# Altium PCB 20K Control Board V1.1.PcbDoc (part 3 of 24)
Units mm, origin at the board's own origin, x right, y up, seen from the top; angles counter-clockwise.
Board outline 132 x 260 mm, 4 copper layers (Top Layer, GND, VCC, Bottom Layer); 1384 components, 779 nets, 4515 pads, 1774 vias.
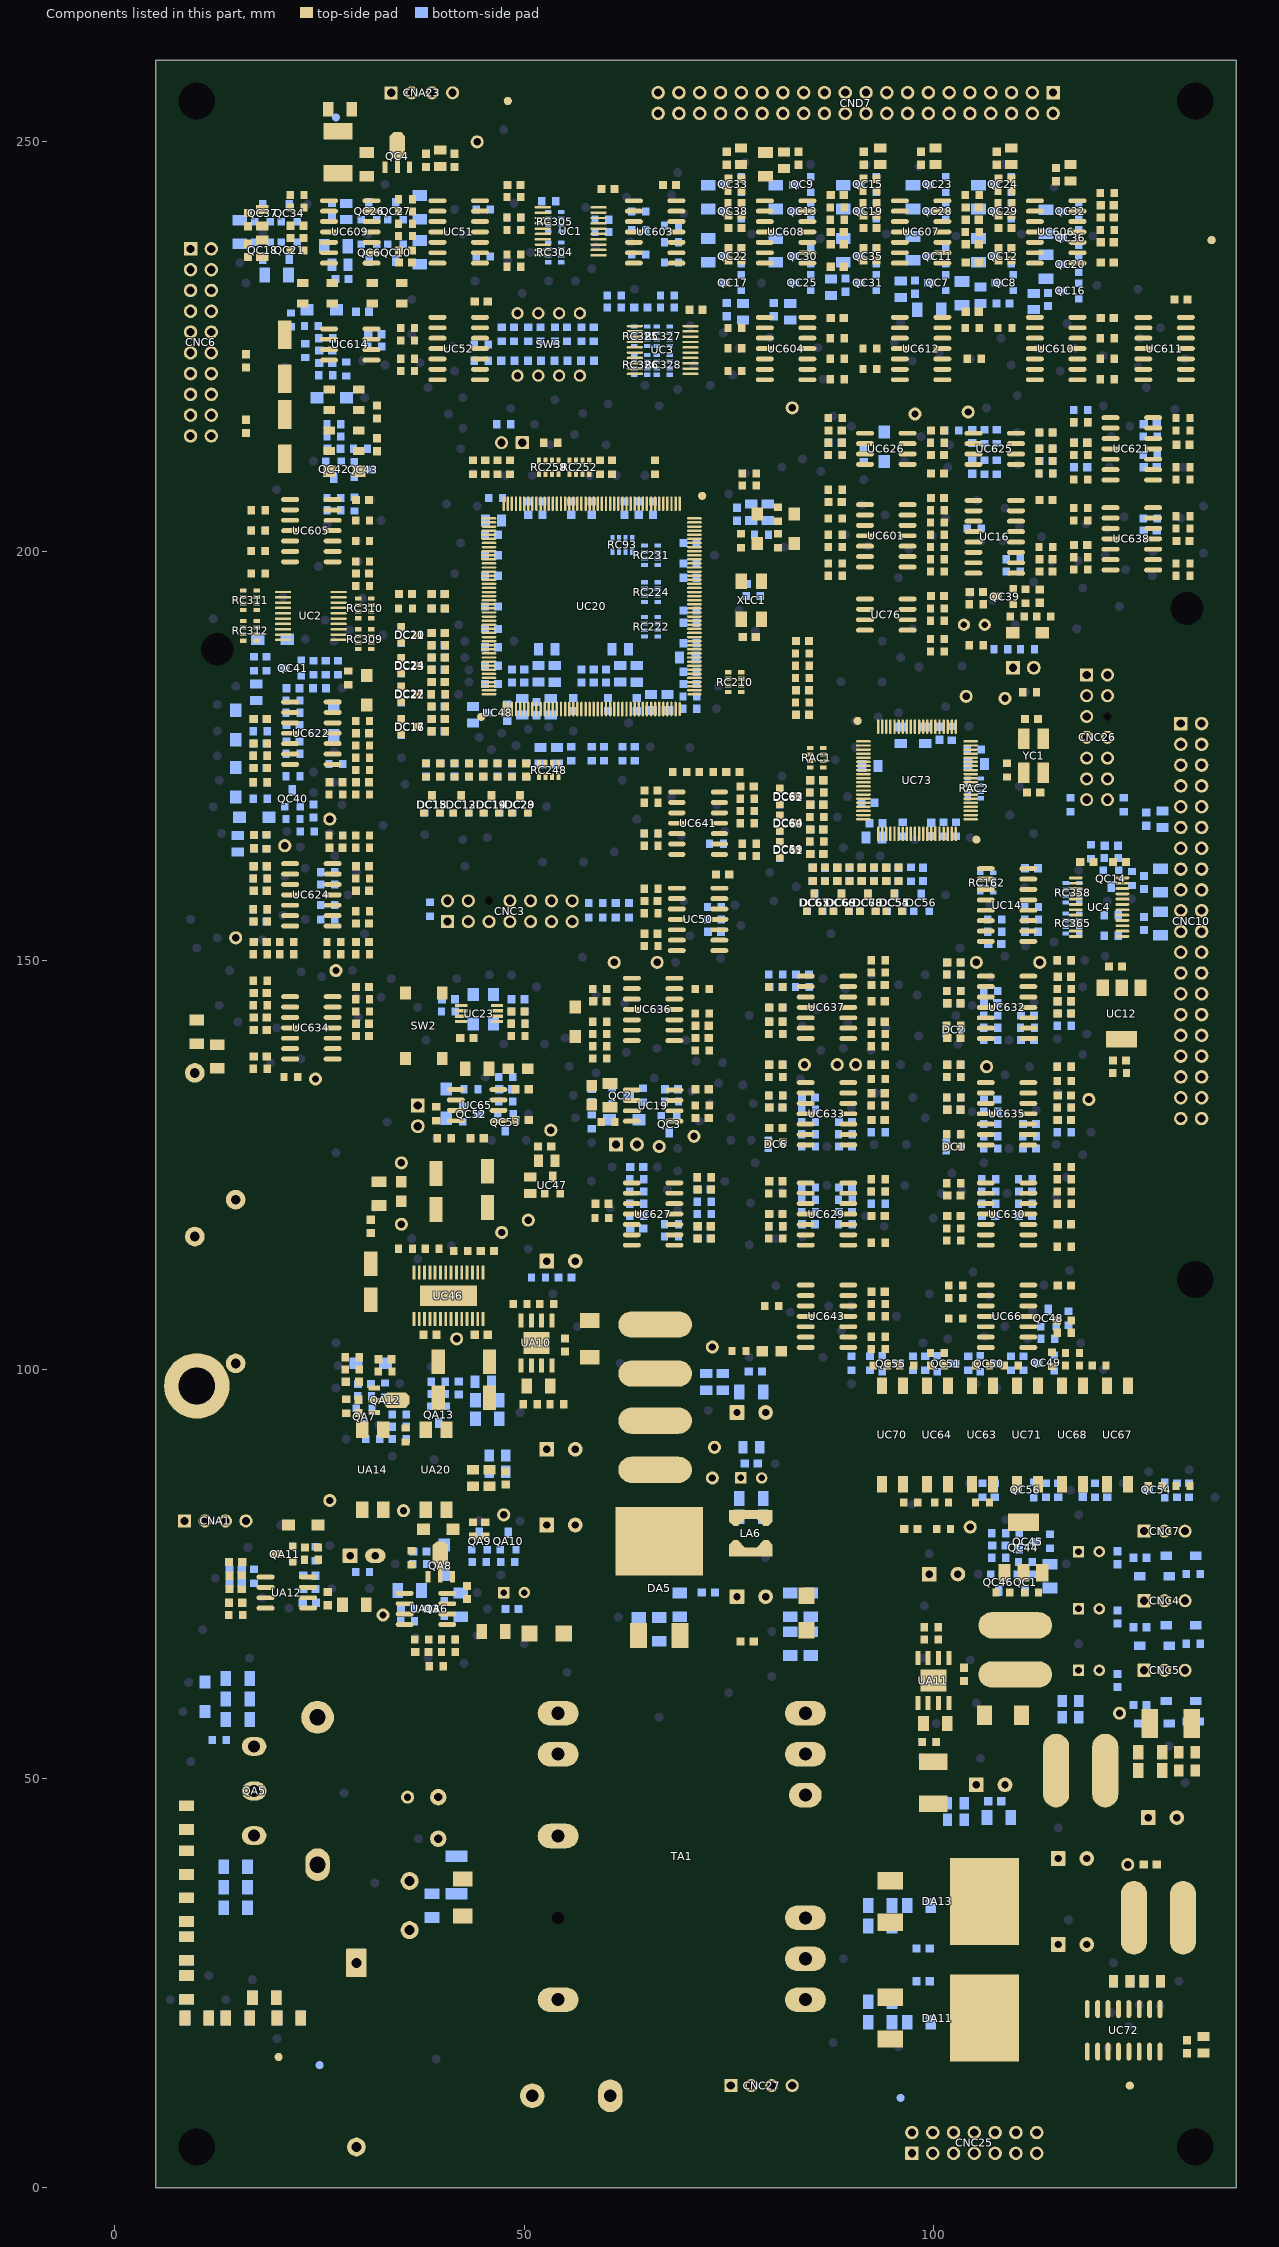
[diagram p5: the components of this part, seen from the top]

## Footprints (in the part's own frame and the unit in brackets; to place one, negate y for a bottom-side part, rotate by r counter-clockwise, add the part's x,y. Pads: shape width x height; smd on the part's side, far side on the other; paste and mask are expansions set on the pad) (continued)
CN2.54-2*20P#2 [mm] "牛角端子/Body size:8.5*70mm /Pitch:2.54mm/2*20P"
  rect 1.65x1.65 hole 1: 1(-24.13,-1.27)
  round 1.65 hole 1: 2(-24.13,1.27) 3(-21.59,-1.27) 4(-21.59,1.27) 5(-19.05,-1.27) 6(-19.05,1.27) 7(-16.51,-1.27) 8(-16.51,1.27) 9(-13.97,-1.27) 10(-13.97,1.27) 11(-11.43,-1.27) 12(-11.43,1.27) 13(-8.89,-1.27) 14(-8.89,1.27) 15(-6.35,-1.27) 16(-6.35,1.27) 17(-3.81,-1.27) 18(-3.81,1.27) 19(-1.27,-1.27) 20(-1.27,1.27) 21(1.27,-1.27) 22(1.27,1.27) 23(3.81,-1.27) 24(3.81,1.27) 25(6.35,-1.27) 26(6.35,1.27) 27(8.89,-1.27) 28(8.89,1.27) 29(11.43,-1.27) 30(11.43,1.27) 31(13.97,-1.27) 32(13.97,1.27) 33(16.51,-1.27) 34(16.51,1.27) 35(19.05,-1.27) 36(19.05,1.27) 37(21.59,-1.27) 38(21.59,1.27) 39(24.13,-1.27) 40(24.13,1.27)
  silkscreen extent -45.7,-5.02 35.2,4.25, body extent -35.3,-4.3 35.3,4.3, height 17
CN2P9.52 [mm] "CN2P9.52"
  round 3 hole 1.5: 1(-4.76,0)
  oval 3x4 hole 1.5: 2(4.76,0)
  silkscreen extent -9.52,-7.9 10.24,4.6
CN-SIP2.54-2P#1 [mm] "Pin header/Body Size:5.08*2.5mm/pitch:2.54mm/2pin S/T"
  rrect10% 1.7x1.7 hole 1: 1(-1.27,0)
  round 1.7 hole 1: 2(1.27,0)
  silkscreen extent -2.54,-2.1 2.54,1.27, body extent -2.47,-1.3 2.53,1.3, height 8.5
CN-SIP2.54-2P#2 [mm] "Pin header/Body Size:5.08*2.5mm/pitch:2.54mm/2pin S/T"
  rrect10% 1.6x1.6 hole 1: 1(-1.27,0)
  round 1.6 hole 1: 2(1.27,0)
  silkscreen extent -3.25,-1.27 2.54,1.27, body extent -2.47,-1.3 2.53,1.3, height 8.5
"D2PAK - 1" [mm] "SM DIODE,D2PAK package"
  rect 3.1x2.1 smd: 1(6.75,-2.54) 3(6.75,2.54)
  rect 8.38x10.66 smd: 2(-4.75,0) 4(-4.75,0)
  silkscreen extent -10.4,-6.3 9.25,6.25, body extent -8.2,-4.8 7.9,4.8, height 4.5
DIP-4-SM-P11-1 [mm] "DIP; 4 Trim Leads; Row Spacing 11 mm; Pitch 2.54 mm"
  rect 1.2x2 smd: 1(-1.27,-6) 2(1.27,-6) 3(1.27,6) 4(-1.27,6)
  silkscreen extent -2.78,-6.1 2.5,3.65, body extent -2.3,-6.75 2.3,6.65, height 3.5
DO-5.08/2.5 [mm] "Raxial,BodySize:3.8x1.9,Pitch5.08mm,Dia2.0mm"
  round 2 hole 1: 1(0,0) 2(5.08,0)
  silkscreen extent -1.27,-1.27 5.08,1.27, body extent -1.23,-1.25 5.5,1.28, height 10
DO-SMA [mm] "DO-214-AC/SMA; 2 C-Bend Leads; Body 5.3 5x 2.9 mm, inc. leads (LxW)"
  rect 2x2 smd: 1(-2.1,0) 2(2.1,0)
  silkscreen extent -3.6,-1.5 4,1.5, body extent -2.7,-1.5 2.7,1.5, height 2.4
DO-SMB [mm] "DO-214-AA/SMB; 2 C-Bend Leads; Body 5.6 x 3.95 mm, inc. leads (LxW)"
  rect 1.82x2.38 smd: 1(-2.25,0) 2(2.25,0)
  silkscreen extent -3.8,-2 4.32,2, body extent -3.2,-2 3.2,2, height 2.5
EC2.54/6.3#1 [mm] "Aluminuim Electrolytic capacitor, Dia 6.3mm,pitch2.54"
  rrect10% 1.4x1.4 hole 0.8: 1(1.27,0)
  round 1.4 hole 0.8: 2(-1.27,0)
  silkscreen extent -3.36,-3.15 3.15,3.15, body extent -3.14,-3.08 3.14,3.2, height 13.5
EC2.54/6.3#2 [mm] "Aluminuim Electrolytic capacitor, Dia 6.3mm,pitch2.54"
  rrect10% 1.4x1.4 hole 0.9: 1(1.27,0)
  oval 2.5x1.8 hole 0.9 slot 1.8 at 0 deg: 2(-1.805,0)
  silkscreen extent -3.36,-3.15 3.15,3.15, body extent -3.14,-3.08 3.14,3.2, height 13.5
EC3.5/8.5#1 [mm] "Aluminuim Electrolytic capacitor, Dia 8.5mm,pitch3.5"
  rrect10% 1.8x1.8 hole 0.9: 1(1.75,0)
  round 1.8 hole 0.9: 2(-1.75,0)
  silkscreen extent -4.36,-4.25 4.27,4.25, body extent -4.13,-4.3 4.33,4.18, height 17
EC3.5/8.5#2 [mm] "Aluminuim Electrolytic capacitor, Dia 8.5mm,pitch3.5"
  rrect10% 1.8x1.8 hole 0.9: 1(1.75,0)
  oval 2.5x1.8 hole 0.9 slot 1.8 at 0 deg: 2(-1.325,0)
  silkscreen extent -4.36,-4.25 4.27,4.25, body extent -4.13,-4.3 4.33,4.18, height 17
EC39(8+8P)-1 [mm]
  oval 5x3 hole 1.6: 1(-15.094,17.5) 2(-15.094,12.5) 4(-15.094,2.5) 8(-15.094,-17.5) 9(15.106,-17.5) 10(15.106,-12.5) 11(15.106,-7.5) 15(15.106,12.5) 16(15.106,17.5)
  round 0 all layers, no hole: 6(-15.094,-7.5)
  round 0 hole 1.6 unplated: 6(-15.094,-7.5)
  oval 4x3 hole 1.6: 14(15.106,7.5)
  silkscreen extent -22,-22.5 22,22.5, body extent -21.61,-22.05 21.34,22.07, height 33
EC47UF/6.3VSM-5 [mm]
  rect 3x1.6 smd: 1(2.2,0) 2(-2.2,0)
  silkscreen extent -3,-3 3,3, body extent -3,-3 3,3, height 6.01
EC220UF/16VSM-6.3 [mm] "Aluminium Electrolytic Chip Capacitor,body6.6x6.6mm,MLEseries"
  rect 3.5x1.6 smd: 1(2.7,0) 2(-2.7,0)
  silkscreen extent -3.65,-3.65 3.65,3.65, body extent -3.6,-3.65 3.66,3.61, height 7.01
HS30x10x37.5 [mm] "HS30x10x37.5"
  round 4 hole 2: 1(-9,5)
  oval 4x3 hole 2: 2(9,5)
  silkscreen extent -15,0 15,10
"L1110SM- 39UH" [mm] "Chip Inductor, 2 Leads; Body 11x10mm (LxW),pitch6mm"
  oval 3.2x9 smd mask+0.2: 1(-3,0) 2(3,0)
  silkscreen extent -5.5,-5.21 5.5,5.25, body extent -5.51,-5.21 5.51,5.26, height 5.2
L2012-0805 [mil] "Chip Inductor, Body 2.0x1.2mm, IPC Medium Density"
  rect 45x59 smd: 1(-40,0) 2(40,0)
  silkscreen extent -71,-39 72,39, body extent -39,-28 39,28, height 43
L4848SM [mm] "Body Size:4.8*4.8mm"
  rect 1.1x5.3 smd: 1(-2.275,0.05) 2(2.275,0.05)
  oct 2x1.5 smd rot 135: 1(-1.825,-1.625) 2(1.825,1.725)
  oct 2x1.5 smd rot 45: 1(-1.825,1.725) 2(1.825,-1.625)
  silkscreen extent -2.98,-2.85 3,2.9, body extent -2.41,-2.38 2.41,2.43, height 2.8
LED2012-0805SM [mm] "Body:2.0x1.2mm,Pitch2.3mm"
  rect 1.4x1.3 smd: 1(1.175,0) 2(-1.175,0)
  silkscreen extent -2.54,-0.91 2.05,0.97, body extent -1,-0.6 1,0.6, height 0.75
LTV816SB-V [mm] "LTV816SB-V"
  rect 1.5x2 smd: 1(-1.27,-4.9) 2(1.27,-4.9) 3(1.27,4.9) 4(-1.27,4.9)
  silkscreen extent -3.01,-4.95 2.3,3.25
MARK_A#1 [mm] "LEFT DOWN"
  round 1 smd mask+1: 1(0,0)
MARK_A#2 [mm] "LEFT DOWN"
  round 1 smd mask+1: 1(0,0)
  Top Layer circle w0.5: c0,0 r2.25
MARK_B#1 [mm] "RIGHT UP"
  round 1 smd mask+1: 1(0,0)
MARK_B#2 [mm] "RIGHT UP"
  round 1 smd mask+1: 1(0,0)
  Top Layer lines w0.5: -2,-2 2,-2 2,2 -2,2 -2,-2
MSOP-8M [mm] "Mini Small Outline Package, Body5.05x3.05mm,pitch0.65mm"
  rect 0.4x1.5 smd: 1(-0.975,-2.177) 2(-0.325,-2.177) 3(0.325,-2.177) 4(0.975,-2.177) 5(0.975,2.177) 6(0.325,2.177) 7(-0.325,2.177) 8(-0.975,2.177)
  silkscreen extent -1.91,-2.18 1.53,1.24, body extent -1.5,-1.5 1.5,1.5, height 1.1
PC104/1600V-22.5 [mm] "Plastic Capacitor, Body26.5*11mm,pitch22.5mm"
  round 2.286 hole 1.2: 1(-11.25,0)
  rrect10% 3.5x2.5 hole 1.2 slot 2.2 at 0 deg: 2(11.25,0)
  silkscreen extent -13.25,-5.5 13.25,5.5, body extent -13.25,-5.5 13.25,5.5, height 21
R3W-S [mm] "3W卧式，Pitch 20mm，Body 5x15mm（小型化）"
  round 2.4 hole 1.2: 1(-10,0) 2(10,0)
  silkscreen extent -10,-2.5 10,2.5, body extent -10.4,-2.5 10.4,2.5, height 5.98
R3WA-5.0-S [mm] "3W立式，Pitch 5mm，Body 5x15mm（小型化）"
  round 2.2 hole 1.2: 1(0,0) 2(6,0)
  silkscreen extent -2.5,-2.5 5,2.5, body extent -2.48,-2.49 5.4,2.5, height 18
R0603SM [mm] "R0603SM"
  rect 0.9x1 smd: 1(-0.85,0) 2(0.85,0)
  silkscreen extent -1.55,-0.75 1.55,0.75, body extent -0.8,-0.4 0.8,0.4, height 0.45
R0603SM*4 [mm] "R0603SM*4"
  rect 0.5x0.8 smd: 1(-1.2,-0.8) 2(-0.4,-0.8) 3(0.4,-0.8) 4(1.2,-0.8) 5(1.2,0.8) 6(0.4,0.8) 7(-0.4,0.8) 8(-1.2,0.8)
  silkscreen extent -1.75,-0.87 1.7,0.87, body extent -1.6,-0.8 1.6,0.8, height 0.5
R1206SM [mm] "R1206SM"
  rect 1.3x1.8 smd: 1(-1.45,0) 2(1.45,0)
  silkscreen extent -2.35,-1.15 2.35,1.15, body extent -1.6,-0.8 1.6,0.8, height 0.55
R1608-0603 [mm] "Chip Resistor, Body 1.6x0.8mm, IPC Medium Density"
  rect 0.9x1 smd: 1(-0.85,0) 2(0.85,0)
  silkscreen extent -1.55,-0.75 1.55,0.75, body extent -0.8,-0.4 0.8,0.4, height 0.45
R3216-1206 [mm] "Chip Resistor, Body 3.2x1.6mm, IPC Medium Density"
  rect 1.3x1.8 smd: 1(-1.45,0) 2(1.45,0)
  silkscreen extent -2.35,-1.15 2.35,1.15, body extent -1.6,-0.8 1.6,0.8, height 0.55
R5025-2010 [mm] "Chip Resistor, Body 5.0x2.5mm, IPC Medium Density"
  rect 1.4x2.7 smd: 1(-2.3,0) 2(2.3,0)
  silkscreen extent -3.25,-1.6 3.25,1.6, body extent -2.5,-1.3 2.5,1.3, height 0.55
RN0603*4 [mm] "Chip Resistor Array, (0603x4); SM; 8 Leads; Body 3.40 x 1.75 mm (LxW max)"
  rect 0.5x0.8 smd: 1(-1.2,-0.8) 2(-0.4,-0.8) 3(0.4,-0.8) 4(1.2,-0.8) 5(1.2,0.8) 6(0.4,0.8) 7(-0.4,0.8) 8(-1.2,0.8)
  silkscreen extent -1.75,-0.87 1.7,0.87, body extent -1.6,-0.8 1.6,0.8, height 0.5
SC40_M3 [mm] "SC40_M3"
  round 0 hole 4.5 unplated mask+0.05: 1(0,0)
  silkscreen extent -4,-4 4,5.98
SC50_M4-GND [mm] "SC50_M4-GND"
  round 8 hole 4.5: 1(0,0)
  silkscreen extent -4,-4 4,7.48
SC-70 [mm] "Body Size2.5x2.1mm: Pitch0.65mm"
  rect 0.9x0.6 smd: 1(-0.927,0.65) 2(-0.927,-0.65) 3(0.927,0)
  silkscreen extent -0.89,-1 0.25,1.35, body extent -1.1,-1 1,1, height 0.9
SC-MC [mm]
  round 0 hole 4 unplated: 1(0,0)
SO8 [mm] "Small Outline; 8 Leads; Body Width 3.9 mm; Pitch 1.27/5.2 mm"
  oval 0.6x2.2 smd: 1(-1.905,-2.6) 2(-0.635,-2.6) 3(0.635,-2.6) 4(1.905,-2.6) 5(1.905,2.6) 6(0.635,2.6) 7(-0.635,2.6) 8(-1.905,2.6)
  silkscreen extent -2.6,-4.2 2.5,1.1, body extent -2.5,-2 2.5,2, height 1.55
SO8-5X4-PD [mm] "SO8,9Pin,Body size:5.0x4.0mm,Pin pitch:1.27mm"
  rect 0.61x1.7 smd: 1(-1.905,-2.75) 2(-0.635,-2.75) 3(0.635,-2.75) 4(1.905,-2.75) 5(1.905,2.75) 6(0.635,2.75) 7(-0.635,2.75) 8(-1.905,2.75)
  rect 3.2x2.7 smd: 9(0,0)
  silkscreen extent -2.85,-2.88 2.5,1.65
SO14#1 [mm] "Small Outline; 14 Leads; Body Width 3.9 mm; Pitch 1.27/5.2mm"
  oval 0.6x2.2 smd: 1(-3.81,-2.6) 2(-2.54,-2.6) 3(-1.27,-2.6) 4(0,-2.6) 5(1.27,-2.6) 6(2.54,-2.6) 7(3.81,-2.6) 8(3.81,2.6) 9(2.54,2.6) 10(1.27,2.6) 11(0,2.6) 12(-1.27,2.6) 13(-2.54,2.6) 14(-3.81,2.6)
  silkscreen extent -5.02,-2.79 4.38,1.1, body extent -4.3,-2.13 4.24,2.16, height 1.1
SO14#2 [mm] "Small Outline; 14 Leads; Body Width 3.9 mm; Pitch 1.27/5.2mm"
  oval 0.6x2.1 smd: 1(-3.81,-2.6) 2(-2.54,-2.6) 3(-1.27,-2.6) 4(0,-2.6) 5(1.27,-2.6) 6(2.54,-2.6) 7(3.81,-2.6) 8(3.81,2.6) 9(2.54,2.6) 10(1.27,2.6) 11(0,2.6) 12(-1.27,2.6) 13(-2.54,2.6) 14(-3.81,2.6)
  silkscreen extent -5.02,-2.79 4.38,1.1, body extent -4.3,-2.13 4.24,2.16, height 1.1
SO16 [mm] "Small Outline; 16 Leads; Body Width 3.9 mm; Pitch 1.27/5.2mm"
  oval 0.6x2.2 smd: 1(-4.445,-2.6) 2(-3.175,-2.6) 3(-1.905,-2.6) 4(-0.635,-2.6) 5(0.635,-2.6) 6(1.905,-2.6) 7(3.175,-2.6) 8(4.445,-2.6) 9(4.445,2.6) 10(3.175,2.6) 11(1.905,2.6) 12(0.635,2.6) 13(-0.635,2.6) 14(-1.905,2.6) 15(-3.175,2.6) 16(-4.445,2.6)
  silkscreen extent -5,-4.9 5,1.1, body extent -4.93,-2.11 4.9,2.18, height 1.1
SOD-123#1 [mm]
  rect 1.6x1.4 smd: 1(1.8,0) 2(-1.8,0)
  silkscreen extent -3.3,-1.2 2.85,1.2, body extent -2,-1 2,1, height 1.4
SOD-123#2 [mm] "SOD-123,3Pins,Body size:2.8x1.8mm(LxW.max)"
  rect 1.4x1 smd: 1(-1.8,0) 2(1.8,0)
  silkscreen extent -2.85,-1.2 3.3,1.2, body extent -2,-1 2,1, height 1.4
SOT23-3 [mm]
  rect 1x1 smd: 1(-1,-1.175) 2(1,-1.175)
  rect 0.9x1.27 smd: 3(0,1.175)
  silkscreen extent -1.5,-0.3 1.4,0.2, body extent -1.4,-1.4 1.5,1.4, height 1.1
SOT89 [mm] "SOT223,3Pin,Body size:4.5x2.4mm,Pin pitch:1.5mm"
  rect 1.4x0.6 smd: 1(-1.35,1.5) 3(-1.35,-1.5)
  rect 1.8x0.6 smd: 2(-1.15,0)
  oct 3.2x1.9 smd: 2(1.35,0)
  silkscreen extent -1.62,-2.3 1.75,2.47
SOT89N [mm] "SOT89, 3-Leads, Body 4.5x2.4 mm, Pitch 1.5mm, Lead Span 4.1mm, IPC Medium Density"
  rect 1.4x0.6 smd: 1(-1.8,1.5) 3(-1.8,-1.5)
  rect 1.8x0.6 smd: 2(-1.6,0)
  oct 3.2x1.9 smd: 2(0.9,0)
  silkscreen extent -2.07,-2.3 1.3,2.47, body extent -1.3,-2.3 1.3,2.3, height 1.6
SOT223#1 [mm] "SOT-223/SC-73; 4 Leads; Body 6.7 x 7.3 mm, inc. leads (LxW max)"
  rect 1.5x2.15 smd: 1(-2.3,-3.1) 2(0,-3.1) 3(2.3,-3.1)
  rect 3.8x2.15 smd: 4(0,3.1)
  silkscreen extent -3.97,-3.12 3.35,1.63, body extent -3.35,-1.85 3.35,1.85, height 1.8
SOT223#2 [mm] "SOT223,4Pin,Body size:6.5x3.5mm,Pin pitch:2.3mm"
  rect 1.5x2 smd: 1(-2.3,-3.15) 2(0,-3.15) 3(2.3,-3.15)
  rect 3.8x2 smd: 2(0,3.15)
  silkscreen extent -3.9,-3.45 3.35,1.85
SOT-23 [mil]
  rect 36x36 smd: 1(0,0) 2(75,0)
  rect 36x50 smd: 3(38,80)
  silkscreen extent -16,30 91,45, body extent -18,-15 97,95, height 43
"SOT-23 - 1" [mil]
  rect 36x36 smd: 1(0,0) 2(-75,0)
  rect 36x50 smd: 3(-37,80)
  silkscreen extent -91,30 16,43, body extent -93,-15 22,95, height 43
SQFP50P-80 [mm] "Shrink QFP, 80-Leads, Body 12x12mm, Pitch 0.5mm, IPC Medium Density"
  oval 1.8x0.3 smd: 1(-6.55,4.75) 2(-6.55,4.25) 3(-6.55,3.75) 4(-6.55,3.25) 5(-6.55,2.75) 6(-6.55,2.25) 7(-6.55,1.75) 8(-6.55,1.25) 9(-6.55,0.75) 10(-6.55,0.25) 11(-6.55,-0.25) 12(-6.55,-0.75) 13(-6.55,-1.25) 14(-6.55,-1.75) 15(-6.55,-2.25) 16(-6.55,-2.75) 17(-6.55,-3.25) 18(-6.55,-3.75) 19(-6.55,-4.25) 20(-6.55,-4.75) 41(6.55,-4.75) 42(6.55,-4.25) 43(6.55,-3.75) 44(6.55,-3.25) 45(6.55,-2.75) 46(6.55,-2.25) 47(6.55,-1.75) 48(6.55,-1.25) 49(6.55,-0.75) 50(6.55,-0.25) 51(6.55,0.25) 52(6.55,0.75) 53(6.55,1.25) 54(6.55,1.75) 55(6.55,2.25) 56(6.55,2.75) 57(6.55,3.25) 58(6.55,3.75) 59(6.55,4.25) 60(6.55,4.75)
  oval 0.3x1.8 smd: 21(-4.75,-6.55) 22(-4.25,-6.55) 23(-3.75,-6.55) 24(-3.25,-6.55) 25(-2.75,-6.55) 26(-2.25,-6.55) 27(-1.75,-6.55) 28(-1.25,-6.55) 29(-0.75,-6.55) 30(-0.25,-6.55) 31(0.25,-6.55) 32(0.75,-6.55) 33(1.25,-6.55) 34(1.75,-6.55) 35(2.25,-6.55) 36(2.75,-6.55) 37(3.25,-6.55) 38(3.75,-6.55) 39(4.25,-6.55) 40(4.75,-6.55) 61(4.75,6.55) 62(4.25,6.55) 63(3.75,6.55) 64(3.25,6.55) 65(2.75,6.55) 66(2.25,6.55) 67(1.75,6.55) 68(1.25,6.55) 69(0.75,6.55) 70(0.25,6.55) 71(-0.25,6.55) 72(-0.75,6.55) 73(-1.25,6.55) 74(-1.75,6.55) 75(-2.25,6.55) 76(-2.75,6.55) 77(-3.25,6.55) 78(-3.75,6.55) 79(-4.25,6.55) 80(-4.75,6.55)
  silkscreen extent -8.9,-5.25 5.25,5.25, body extent -6,-6 6,6, height 2.2
SQFP-176 [mm] "Shrink QFP, 176-Leads, Body 24x24mm, Pitch 0.5mm, IPC Medium Density"
  oval 1.8x0.3 smd: 1(-12.55,10.75) 2(-12.55,10.25) 3(-12.55,9.75) 4(-12.55,9.25) 5(-12.55,8.75) 6(-12.55,8.25) 7(-12.55,7.75) 8(-12.55,7.25) 9(-12.55,6.75) 10(-12.55,6.25) 11(-12.55,5.75) 12(-12.55,5.25) 13(-12.55,4.75) 14(-12.55,4.25) 15(-12.55,3.75) 16(-12.55,3.25) 17(-12.55,2.75) 18(-12.55,2.25) 19(-12.55,1.75) 20(-12.55,1.25) 21(-12.55,0.75) 22(-12.55,0.25) 23(-12.55,-0.25) 24(-12.55,-0.75) 25(-12.55,-1.25) 26(-12.55,-1.75) 27(-12.55,-2.25) 28(-12.55,-2.75) 29(-12.55,-3.25) 30(-12.55,-3.75) 31(-12.55,-4.25) 32(-12.55,-4.75) 33(-12.55,-5.25) 34(-12.55,-5.75) 35(-12.55,-6.25) 36(-12.55,-6.75) 37(-12.55,-7.25) 38(-12.55,-7.75) 39(-12.55,-8.25) 40(-12.55,-8.75) 41(-12.55,-9.25) 42(-12.55,-9.75) 43(-12.55,-10.25) 44(-12.55,-10.75) 90(12.55,-10.25) 91(12.55,-9.75) 92(12.55,-9.25) 93(12.55,-8.75) 94(12.55,-8.25) 95(12.55,-7.75) 96(12.55,-7.25) 97(12.55,-6.75) 98(12.55,-6.25) 99(12.55,-5.75) 100(12.55,-5.25) 101(12.55,-4.75) 102(12.55,-4.25) 103(12.55,-3.75) 104(12.55,-3.25) 105(12.55,-2.75) 106(12.55,-2.25) 107(12.55,-1.75) 108(12.55,-1.25) 109(12.55,-0.75) 110(12.55,-0.25) 111(12.55,0.25) 112(12.55,0.75) 113(12.55,1.25) 114(12.55,1.75) 115(12.55,2.25) 116(12.55,2.75) 117(12.55,3.25) 118(12.55,3.75) 119(12.55,4.25) 120(12.55,4.75) 121(12.55,5.25) 122(12.55,5.75) 123(12.55,6.25) 124(12.55,6.75) 125(12.55,7.25) 126(12.55,7.75) 127(12.55,8.25) 128(12.55,8.75) 129(12.55,9.25) 130(12.55,9.75) 131(12.55,10.25) 132(12.55,10.75)
  oval 0.3x1.8 smd: 45(-10.75,-12.55) 46(-10.25,-12.55) 47(-9.75,-12.55) 48(-9.25,-12.55) 49(-8.75,-12.55) 50(-8.25,-12.55) 51(-7.75,-12.55) 52(-7.25,-12.55) 53(-6.75,-12.55) 54(-6.25,-12.55) 55(-5.75,-12.55) 56(-5.25,-12.55) 57(-4.75,-12.55) 58(-4.25,-12.55) 59(-3.75,-12.55) 60(-3.25,-12.55) 61(-2.75,-12.55) 62(-2.25,-12.55) 63(-1.75,-12.55) 64(-1.25,-12.55) 65(-0.75,-12.55) 66(-0.25,-12.55) 67(0.25,-12.55) 68(0.75,-12.55) 69(1.25,-12.55) 70(1.75,-12.55) 71(2.25,-12.55) 72(2.75,-12.55) 73(3.25,-12.55) 74(3.75,-12.55) 75(4.25,-12.55) 76(4.75,-12.55) 77(5.25,-12.55) 78(5.75,-12.55) 79(6.25,-12.55) 80(6.75,-12.55) 81(7.25,-12.55) 82(7.75,-12.55) 83(8.25,-12.55) 84(8.75,-12.55) 85(9.25,-12.55) 86(9.75,-12.55) 87(10.25,-12.55) 133(10.75,12.55) 134(10.25,12.55) 135(9.75,12.55) 136(9.25,12.55) 137(8.75,12.55) 138(8.25,12.55) 139(7.75,12.55) 140(7.25,12.55) 141(6.75,12.55) 142(6.25,12.55) 143(5.75,12.55) 144(5.25,12.55) 145(4.75,12.55) 146(4.25,12.55) 147(3.75,12.55) 148(3.25,12.55) 149(2.75,12.55) 150(2.25,12.55) 151(1.75,12.55) 152(1.25,12.55) 153(0.75,12.55) 154(0.25,12.55) 155(-0.25,12.55) 156(-0.75,12.55) 157(-1.25,12.55) 158(-1.75,12.55) 159(-2.25,12.55) 160(-2.75,12.55) 161(-3.25,12.55) 162(-3.75,12.55) 163(-4.25,12.55) 164(-4.75,12.55) 165(-5.25,12.55) 166(-5.75,12.55) 167(-6.25,12.55) 168(-6.75,12.55) 169(-7.25,12.55) 170(-7.75,12.55) 171(-8.25,12.55) 172(-8.75,12.55) 173(-9.25,12.55) 174(-9.75,12.55) 175(-10.25,12.55) 176(-10.75,12.55)
  oval 0.3x1.7 smd: 88(10.75,-12.55)
  oval 1.7x0.3 smd: 89(12.55,-10.75)
  silkscreen extent -12.92,-11.25 11.25,11.78, body extent -12,-12 12,12, height 3.2
SSOP-20 [mm] "SMD IC,Octal Buffers/Driver 3-State Outputs/SO-20"
  oval 0.3x2 smd: 1(-0.004,0.029) 2(0.646,0.029) 3(1.296,0.029) 4(1.946,0.029) 5(2.596,0.029) 6(3.246,0.029) 7(3.896,0.029) 8(4.546,0.029) 9(5.196,0.029) 10(5.846,0.029) 11(5.846,6.829) 12(5.196,6.829) 13(4.546,6.829) 14(3.896,6.829) 15(3.246,6.829) 16(2.596,6.829) 17(1.946,6.829) 18(1.296,6.829) 19(0.646,6.829) 20(-0.004,6.829)
  silkscreen extent -0.68,0.78 6.52,6.08, body extent -0.78,-1.07 6.62,7.93, height 2
"SW DTSM-6" [mm]
  rect 1.6x1.3 smd: 1(-4,2.25) 2(4,2.25) 3(-4,-2.25) 4(4,-2.25)
  silkscreen extent -3.2,-3.1 3.2,3.1, body extent -4.57,-3.15 4.57,3.16, height 4.57
SW-DIP4 [mm]
  round 1.5 hole 0.9: 1(-3.81,-3.81) 2(-1.27,-3.81) 3(1.27,-3.81) 4(3.81,-3.81) 5(3.81,3.81) 6(1.27,3.81) 7(-1.27,3.81) 8(-3.81,3.81)
  silkscreen extent -6.31,-7.42 5.69,5.15, body extent -6,-5.5 5.79,5.25, height 6.5
TEST-12 [mm] "Testpoint,Hole0.8mm, Dia3.0mm"
  round 1.6 hole 0.9: 1(0,0)
  silkscreen extent -1.1,-1.1 1.1,1.1
TO-247 [mm] "Body15.75*5.15,pitch5.45mm.螺丝孔高18.5mm"
  oval 2.3x3 hole 1.5: 1(-5.45,0) 2(0,0) 3(5.45,0)
  silkscreen extent -7.8,-2.4 7.8,2.7, body extent -7.9,-2.4 7.9,2.9, height 26.3
TSOP-24 [mm] "TSOP, 24-Leads, Body 7.8x4.4mm, Pitch 0.65mm, IPC Medium Density"
  oval 1.7x0.35 smd: 1(-2.85,3.575) 2(-2.85,2.925) 3(-2.85,2.275) 4(-2.85,1.625) 5(-2.85,0.975) 6(-2.85,0.325) 7(-2.85,-0.325) 8(-2.85,-0.975) 9(-2.85,-1.625) 10(-2.85,-2.275) 11(-2.85,-2.925) 12(-2.85,-3.575) 13(2.85,-3.575) 14(2.85,-2.925) 15(2.85,-2.275) 16(2.85,-1.625) 17(2.85,-0.975) 18(2.85,-0.325) 19(2.85,0.325) 20(2.85,0.975) 21(2.85,1.625) 22(2.85,2.275) 23(2.85,2.925) 24(2.85,3.575)
  silkscreen extent -2.97,-3.95 1.6,4.42, body extent -2.25,-3.95 2.25,3.95, height 1.1
TSSOP28-9.8X4.5-PD [mm] "TSSOP28,28Pins,Body size:9.8x4.5mm,Pin pitch:0.65mm"
  rect 0.35x1.7 smd: 1(-4.225,-2.85) 2(-3.575,-2.85) 3(-2.925,-2.85) 4(-2.275,-2.85) 5(-1.625,-2.85) 6(-0.975,-2.85) 7(-0.325,-2.85) 8(0.325,-2.85) 9(0.975,-2.85) 10(1.625,-2.85) 11(2.275,-2.85) 12(2.925,-2.85) 13(3.575,-2.85) 14(4.225,-2.85) 15(4.225,2.85) 16(3.575,2.85) 17(2.925,2.85) 18(2.275,2.85) 19(1.625,2.85) 20(0.975,2.85) 21(0.325,2.85) 22(-0.325,2.85) 23(-0.975,2.85) 24(-1.625,2.85) 25(-2.275,2.85) 26(-2.925,2.85) 27(-3.575,2.85) 28(-4.225,2.85)
  rect 7x2.5 smd: 29(0,0)
  silkscreen extent -5.07,-2.97 4.9,1.6
TTC3A103F34D2EY [mm] "Themister,Body size:3*4mm,Pitch:2.54mm"
  round 1.5 hole 0.8: 1(-1.27,0) 2(1.27,0)
  silkscreen extent -2.5,-1.5 2.5,1.5, body extent -2,-0.8 2,0.7, height 3.98
TVS-SMB [mm] "DO-214-AA/SMB; 2 C-Bend Leads; Body 5.6 x 3.95 mm, inc. leads (LxW)"
  rect 1.82x2.38 smd: 1(-2.25,0) 2(2.25,0)
  silkscreen extent -3.8,-2 4.31,2, body extent -3.2,-2 3.2,2, height 2.5
XL49TSM_1 [mm] "SMD Crystal, body6x3.5mm(LxW), ptich4.6/2.4mm"
  rect 1.9x1.4 smd: 1(-2.3,-1.25) 2(2.3,-1.25) 3(2.3,1.25) 4(-2.3,1.25)
  silkscreen extent -3.45,-2.18 3.45,2.18, body extent -2.63,-2.2 2.59,2.21, height 1.1
XL5032SM [mm] "Body 5.0x3.2mm,pitch"
  rect 2.5x1.4 smd: 1(-2.1,-1.2) 2(2.1,-1.2) 3(2.1,1.2) 4(-2.1,1.2)
  silkscreen extent -3.58,-2.22 3.58,2.23, body extent -2.69,-1.46 2.87,1.47, height 2.2

## Part data
12V_FANOUT +5V +5V_COM +12V-A -12V BUS- GND-DRV GND_COM TP2 TP3 TP4 TP5 TP8 TP9 TP10 TP12 TP13 TP14 TP15 TP17 TP18 TP19 TP20 TP24 TP25 TP30 TP38 TP57 TP58 TP59 TP61 TP62 TP64 TP65 TP68 VCC VCC-AUX Vd1 Vref-5V: library part "17K TPD"
CA1 CA2 CA3 CA4 CC22 CC25 CC28 CC29 CC51 CC74 CC142 CC194 CC252: library part "023-104320-0 C0603SM", "100nF/50V/J/X7R/0603"
CA5: library part "023-472220-0 C0603SM", "4.7nF/50V/J/X7R/0603"
CA6: library part "023-221250-0 C1206SM", "220pF/250V/J/C0G/1206"
CA7 CA74 CA94: library part "023-106350-0 C1206SM", "10uF/16V/K/X7R/1206"
CA68 CA83 CA91 CA104: library part "C1206 SM", "220pF/250V/J/C0G/1206"
CA69 CA90: library part CC0603-103SM_J, "10nF/50V/J/X7R/0603"
CA70: library part 17KC472/1KV, "4.7nF/1000V/K/X7R/1206"
CA71 CA72 CA76 CA78 CA81 CA87a CA92 CA96 CA100 CA101 CA103: library part C220UF/25V, "330uF/25V/Φ8*15/4000H/EKY"
CA73 CA77 CA79 CA84 CA86 CA93 CA98 CA102 CA107 CA112 CA114 CA115 CA118 CA122 CC8 CC9 CC15 CC16 CC17 CC18 CC19 CC20 CC21 CC30 CC32 CC33 CC34 CC35 CC42 CC55 CC62 CC63 CC65 CC66 CC68 CC72 CC76 CC77 CC78 CC79 CC80 CC82 CC84 CC87 CC88 CC90 CC95 CC103 CC104 CC105 CC106 CC108 CC110 CC111 CC112 CC113 CC114 CC115 CC116 CC117 CC118 CC119 CC120 CC121 CC122 CC124 CC125 CC126 CC127 CC128 CC129 CC130 CC131 CC141 CC157 CC158 CC159 CC160 CC163 CC169 CC170 CC177 CC178 CC179 CC180 CC181 CC182 CC183 CC184 CC185 CC186 CC187 CC191 CC192 CC193 CC196 CC201 CC204 CC205 CC206 CC213 CC214 CC215 CC216 CC217 CC218 CC219 CC220 CC221 CC222 CC223 CC224 CC225 CC226 CC227 CC231 CC232 CC233 CC234 CC235 CC236 CC240 CC241 CC242 CC243 CC244 CC245 CC246 CC247 CC249 CC255 CC265 CC266 CC271 CC273 CC275 CC276 CC277 CC278 CC280 CC282 CC283 CC287 CC291 CC292 CC293 CC294 CC296 CC298 CC301 CC304 CC317 CC318 CC319 CC321 CC323 CC327 CC350 CC351 CC352 CC355 CC393 CC396 CC397 CC398 CC401 CC402 CC405 CC411 CC420 CC424 CC425 CC436 CC437 CC439 CC442: library part "C0603 SM", "100nF/50V/J/X7R/0603"
CA75: library part PC0.1uF/1600V, "0.1uF/1600VDC/±10%/P22.5/12*22*26.5"
CA80 CA82 CC50 CC81 CC197: library part C100UF插件, "150uF/25V/P2.5/Φ6.3*11/6000H"
CA85: library part "C1206 SM", "1uF/50V/K/X7R/1206"
CA87: library part C100UF插件
CA105 CA120 CC93 CC94 CC98 CC99 CC100 CC135 CC431 CC434: library part "C0603 SM"
CA106 CC58 CC70: library part "C0603 SM", "470pF/50V/J/C0G/0603"
CA108: library part CC0603-471SM, "470pF/50V/J/C0G/0603"
CA109 CA117: library part CC0603-104SM_J, "100nF/50V/J/X7R/0603"
CA110 CC203 CC207 CC208 CC209: library part CC1206-106/16VSM, "10uF/16V/K/X7R/1206"
CA111 CA119: library part CC0603-103SM, "4.7nF/50V/J/X7R/0603"
CA113: library part CC0603-102SM, "1nF/50V/J/C0G/0603"
CA116: library part "C0603 SM", "5.6nF/50V/K/0603"
CA121 CC328 CC329 CC330 CC331 CC332 CC333 CC334 CC335 CC336 CC337 CC338 CC339 CC340 CC341 CC342 CC343 CC354 CC445: library part CC0805-225/16VSM, "2.2uF/16V/K/X7R/0805"
CC1 CC2 CC3 CC4 CC5 CC6 CC7 CC10 CC14 CC24 CC26 CC27 CC36 CC37 CC38 CC41 CC43 CC53 CC56 CC59 CC61 CC69 CC85 CC86 CC91 CC92 CC96 CC97 CC101 CC102 CC210 CC211 CC212 CC228 CC229 CC230 CC237 CC238 CC239 CC250 CC306 CC307: library part "C0603 SM", "220pF/50V/J/C0G/0603"
CC11 CC12 CC13 CC23 CC31 CC39 CC40 CC44 CC52 CC54 CC161 CC162 CC164 CC175 CC176 CC403 CC404: library part "C0603 SM", "22pF/50V/J/C0G/0603"
CC45: library part "023-102220-0 C0603SM", "1nF/50V/J/C0G/0603"
CC46: library part CC0603-104SM, "100nF/50V/J/X7R/0603"
CC47 CC64 CC71 CC132 CC133 CC134 CC136 CC137 CC139 CC140 CC143 CC144 CC145 CC146 CC148 CC149 CC152 CC153 CC154 CC155 CC156 CC165 CC171 CC172 CC173 CC174 CC198 CC200 CC202 CC267 CC268 CC269 CC274 CC281 CC284 CC286 CC288 CC289 CC299 CC305 CC344 CC345 CC394 CC395 CC399 CC406 CC407 CC408 CC416 CC417 CC418 CC421 CC422 CC423 CC428 CC429 CC430 CC446 CC447 CC448 CC449: library part "C0603 SM", "1nF/50V/J/C0G/0603"
CC48: library part C0603SM-3, "220pF/50V/J/C0G/0603"
CC49 CC60 CC67 CC75 CC167 CC168: library part "023-103220-0 C0603SM", "10nF/50V/J/X7R/0603"
CC57 CC73 CC346 CC347: library part "C0603 SM", "100pF/50V/J/C0G/0603"
CC107 CC123 CC150 CC151 CC270 CC272 CC409 CC427 CC440: library part "C0805 SM", "2.2uF/16V/K/X7R/0805"
CC109 CC147: library part "C0805 SM", "1uF/16V/K/X7R/0805"
CC138 CC248 CC326 CC348 CC349 CC356: library part "C0603 SM", "10uF/6.3V/K/X7R/0805"
CC166 CC426: library part "C0603 SM", "10nF/50V/J/X7R/0603"
CC251: library part "023-106330-0 C0805SM", "10uF/6.3V/K/X7R/0805"
CC295 CC302: library part "C0805 SM", "470nF/25V/J/X7R/0805"
CC297 CC300 CC303 CC308 CC309: library part "C0603 SM", "1uF/16V/K/X7R/0805"
CC320 CC322: library part "C1206 SM", "10uF/16V/K/X7R/1206"
CC412 CC413 CC414 CC415: library part C0805TSM, "1uF/16V/K/X7R/0805"
CNA1 CNA23 CNC27: library part "CN 25P04", "Wafer/2.5 pitch/4 pin/182度/白胶/带卡勾"
CNBA3: library part "110-309500-0 CN2P9.52", "接线端子台/9.52mm/2P"
CNC1 CNC2: library part JP05P02, "PIN Header/2.54mm/1*2P/S/T"
CNC3 CNC26: library part CN2.54-2*7P, "Box header/2.54mm/2*7P/S/T"
CNC4 CNC5 CNC7: library part "CN 25P03", "Wafer/2.5 pitch/3 pin/181度/白胶/带卡勾"
CNC6: library part CN2.54-2*10P, "Ejector header/2.54mm/2*10P/180°"
CNC10: library part CN2.54-2*20P, "Ejector Header/2.54mm/2*20P/S/T/Long"
CNC25: library part CN2X7P2.54L, "Ejector Header/2.54mm/2*7P/S/T"
CND7: library part CN2.54-2*20P_1, "Ejector Header/2.54mm/2*20P/S/T/Long"
DA5 DA11 DA13: library part "D MBRB10200CT", "10A/200V/D(2)PAK"
DA6: library part 17KP6SMBJ170, "200V/600W/DO-214AA"
DA7 DA12: library part "D SK24", "2A/40V/DO-214AA"
DA8: library part "D RGP02-14E", "0.5A/1400V/DO-41"
DA9: library part 17KUS1G, "1A/400V/DO-214AC"
DA10: library part "D MURA220T3", "2A/200V/SMB"
DA14 DA15 DC3 DC4 DC5 DC7 DC8 DC9 DC11 DC25 DC26 DC30 DC31 DC33 DC34 DC36 DC39 DC40 DC42 DC45 DC46 DC47 DC48 DC58: library part "D 1N4148W", "0.15A/75V/SOD-123"
DA16 DC10 DC49 DC50: library part "D 1N4148W"
DA17 DC32 DC37 DC38: library part "D S123SM", "0.2A/30V/SOD-123"
DC1 DC2 DC6: library part 17K1SS302, "0.1A/80V/SC-70"
DC12 DC13 DC14 DC15 DC16 DC17 DC18 DC19 DC20 DC21 DC22 DC23 DC24 DC27 DC28 DC29 DC54 DC55 DC56 DC59 DC60 DC61 DC62 DC63 DC64 DC65 DC66 DC67 DC68 DC69 DC70: library part BAT54S, "0.2A/30V/SOT-23"
DC41 DC43 DC44: library part "D 1N4148W", "0.2A/30V/SOD-123"
EC1 EC2 EC3 EC4 EC5: library part C47U/6.3VSM, "47uF/6.3V/Φ5*7/7000H/CW系列"
EC6 EC8: library part C220U/16VSM, "220UF/16V/土20%/105℃/6.3×8.7/7000h"
FA1: library part "FS 1812L110-33MR", "1812L Series/1.1A/33V"
FA2 FA3: library part 17KFUSE1812L110-33, "1812L Series/1.1A/33V"
JC1 JC2: library part CN-Jumper2.54-2P, "PIN Header/2.54mm/1*2P/S/T"
LA2 LA4 LA10 LA12 LA14: library part L10090SM, "39uH/DR10*5.4RB K38/RI10*3.4*8.2 K38"
LA3 LA5 LA7 LA8 LA9 LA11 LA13 LA15 LA16 LA17 LA18 LA19 LA20: library part L-UPZ2012E601-2R0TF, "600ohm/2A/100MHz/0805"
LA6: library part L7444043100SM, "10uH/1.19A/±30%/4.8*4.8*2.8mm"
LC1 LC2: library part L0805SM, "220Ω±25%/100MHZ/20℃/0805"
LDM1 LDM3: library part LD0805SM, "2.0*1.25*0.75mm/Orange"
LDM2: library part LD0805SM, "2.0*1.25*0.75mm/Green"
LEDA1: library part "D LED0805_Green", "2.0*1.25*0.75mm/Green"
MARK1 MARK4 MARK6 MARK8 MARK10 MARK12: library part MARK_B
MARK2 MARK3 MARK5 MARK7 MARK9 MARK11: library part MARK_A
NTCC1: library part "17K NTC TTC03", "NTC/10Kohm/-40℃--125℃/F/Φ3mm/30mm"
QA5: library part 17KIRF740, "4A/1500V/TO-247"
QA5-HS: library part "431-100000-0 HS30x10x37.5", "20K散热器/37.5*30*21.5mm"
QA6: library part "TR 2SC4672SM", "0.6A/40VDC/SOT-23"
QA7: library part SCR, "0.25A/200V/SOT-23"
QA8: library part "IC TL431SM", "Shunt Regulators/SOT-89"
QA9 QC3 QC10 QC11 QC12 QC13 QC19 QC20 QC21 QC22 QC27 QC28 QC29 QC30 QC35 QC36 QC37 QC38 QC43 QC46 QC48 QC53: library part "TR 2907SM", "0.6A/60VDC/SOT-23"
QA10 QC1 QC2 QC6 QC7 QC8 QC9 QC14 QC15 QC16 QC17 QC18 QC23 QC24 QC25 QC26 QC31 QC32 QC33 QC34 QC42 QC45 QC49 QC50 QC51 QC52 QC54 QC55 QC56: library part "TR 2222SM", "0.6A/40VDC/SOT-23"
QA11: library part "TR 2SA1213SM"
QA12: library part "IC 431SM", "Shunt Regulators/SOT-89"
QA13 QC40 QC41: library part "MOS RK7002SM", "250mA/60V/SOT-23"
QC4: library part "050-210020-0 SOT89", "Shunt Regulators/SOT-89"
QC39: library part "TR 2222SM"
QC44: library part 17KIRFL014NTRPBF, "1.9A/55V/SOT-223"
RA108 RA109 RA118 RA121 RA127 RA131 RA143 RA144: library part R1206SM, "47ohm/1/4W/F/1206"
RA110: library part "RSS 3W 39K", "39Kohm/3W/J/15.5*5"
RA111 RA126: library part R0603SM-3K3, "0ohm/1/10W/F/0603"
RA112 RA120 RA132 RA137: library part R3W-7K5
RA113 RA115 RA133 RA134 RA150 RA163 RA181 RC1 RC20 RC26 RC30 RC31 RC35 RC37 RC44 RC45 RC48 RC54 RC61 RC64 RC71 RC74 RC88 RC101 RC107 RC112 RC114 RC133 RC140 RC143 RC144 RC147 RC157 RC158 RC165 RC178 RC179 RC192 RC198 RC203 RC269 RC270 RC271 RC276 RC277 RC278 RC279 RC287 RC288 RC289 RC290 RC292 RC296 RC298 RC316 RC317 RC359 RC449 RC450 RC453 RC456 RC485 RC489 RC520 RC521 RC522 RC523 RC524 RC525 RC526 RC527 RC528 RC529 RC530 RC531 RC598 RC600 RC602 RC605 RC609 RC612 RC613 RC630 RC651 RC652: library part R0603SM, "10Kohm/1/10W/F/0603"
RA114: library part R2010SM-221R, "2.21ohm/1/2W/F/2010"
RA116: library part R0603SM, "1.5Kohm/1/10W/F/0603"
RA117 RA140: library part R0603SM, "3.24Kohm/1/10W/F/0603"
RA119 RA129: library part R3W-7K5, "3Kohm/1/4W/F/1206"
RA122 RA182 RA183 RC134 RC459 RC462 RC469 RC483 RC484: library part R0603SM
RA123: library part R1206SM, "10ohm/1/4W/F/1206"
RA124 RA125 RA128 RA130 RA135 RA136 RA139 RA141 RA142: library part R1206SM, "100Kohm/1/4W/F/1206"
RA138 RC3 RC4 RC11 RC14 RC33 RC39 RC60 RC65 RC72 RC79 RC105 RC111 RC128 RC146 RC166 RC171 RC175 RC183 RC187 RC189 RC238 RC339 RC604 RC606 RC626 RC642 RC643: library part R0603SM, "2.7Kohm/1/10W/F/0603"
RA145 RA148: library part R1206SM, "68ohm/1/4W/F/1206"
RA146: library part R1206SM
RA147: library part R1206SM-499R, "499ohm/1/4W/F/1206"
RA149 RA155 RA168 RA187 RC38 RC41 RC51 RC53 RC108 RC131 RC164 RC172 RC176 RC186 RC190 RC196 RC197 RC205 RC208 RC211 RC213 RC221 RC257 RC314 RC360 RC443 RC444 RC445 RC446 RC455 RC457 RC460 RC534 RC599 RC607 RC608 RC611 RC614 RC615 RC628 RC634 RC649 RC650 RC672 RC677 RC681: library part R0603SM, "1Kohm/1/10W/F/0603"
RA151 RA171: library part R0603SM-49K9, "49.9Kohm/1/10W/F/0603"
RA152 RA153 RA154: library part R1206SM, "3ohm/1/4W/F/1206"
RA156: library part R0603SM-10K, "10Kohm/1/10W/F/0603"
RA157: library part R0603SM-100K, "40.2Kohm/1/10W/F/0603"
RA158 RA160 RA167 RA169: library part R0603SM-3K3, "3.3Kohm/1/10W/F/0603"
RA159: library part R0603SM-3K3, "10Kohm/1/10W/F/0603"
RA161: library part R0603SM-30K, "2Kohm/1/10W/F/0603"
RA162: library part R0603SM-30K, "33Kohm/1/10W/F/0603"
RA164: library part R0603SM-15K, "15Kohm/1/10W/F/0603"
RA165: library part R0603SM-1K2, "1.2Kohm/1/10W/F/0603"
RA166 RA178 RA185: library part R0603SM-4K7, "4.7Kohm/1/10W/F/0603"
RA170 RC280 RC664: library part R0603SM, "330ohm/1/10W/F/0603"
RA172 RA175: library part R1206SM-1M, "1Mohm/1/4W/F/1206"
RA173 RA174 RA176 RA177: library part R1206SM-1M, "499Kohm/1/4W/F/1206"
RA179: library part R0603SM-30K, "30Kohm/1/10W/F/0603"
RA180: library part R0603SM, "12.4Kohm/1/10W/F/0603"
RA184: library part R0603SM, "3.3Kohm/1/10W/F/0603"
RA186 RA215: library part R0603SM-2K, "4.7Kohm/1/10W/F/0603"
RA188 RC154 RC458 RC461: library part R0603SM, "100Kohm/1/10W/F/0603"
RA192: library part R0603SM-14K, "14Kohm/1/10W/F/0603"
RA198 RA200: library part R1206SM-100R, "1Kohm/1/4W/F/1206"
RA204: library part R0603SM-2K, "2Kohm/1/10W/F/0603"
RAC1 RAC2 RC93: library part "019-472000-0 R0603SM*4", "4.7Kohm/J/0603*4"
RC2 RC6 RC7 RC8 RC10 RC12 RC15 RC19 RC25 RC29 RC32 RC46 RC67 RC68 RC70 RC73 RC84 RC100 RC109 RC110 RC116 RC117 RC122 RC124 RC132 RC135 RC145 RC151 RC163 RC167 RC168 RC169 RC174 RC177 RC180 RC181 RC184 RC191 RC199 RC200 RC201 RC202 RC366 RC698 RC699 RC700: library part R0603SM, "4.99Kohm/1/10W/F/0603"
RC5 RC21 RC66 RC75 RC113 RC136: library part "011-273020-0 R0603SM", "27Kohm/1/10W/F/0603"
RC9 RC13 RC17 RC22 RC83 RC94 RC448 RC471 RC479 RC488 RC497 RC502: library part R0603SM, "15Kohm/1/10W/F/0603"
RC16 RC18 RC50 RC52 RC55 RC56 RC91 RC119 RC127 RC137 RC149 RC207 RC447 RC470 RC478 RC487 RC496 RC594 RC597 RC620 RC621 RC629 RC637 RC638: library part R0603SM, "499ohm/1/10W/F/0603"
RC23 RC24 RC34 RC42 RC57 RC69 RC76 RC87 RC99 RC106 RC218 RC219 RC220 RC228 RC229 RC230 RC233 RC240 RC241 RC255 RC256 RC263 RC264 RC265 RC273 RC274 RC275 RC281 RC282 RC285 RC286 RC595 RC596 RC616 RC631 RC632 RC633 RC644 RC645 RC646 RC655 RC656 RC657 RC666 RC667 RC668: library part R0603SM, "100ohm/1/10W/F/0603"
RC27 RC28 RC36 RC40 RC43 RC80 RC89 RC234 RC235: library part "011-103020-0 R0603SM", "10Kohm/1/10W/F/0603"
RC47: library part "011-103050-0 R1206SM", "10Kohm/1/4W/F/1206"
RC49 RC77: library part "011-101020-0 R0603SM", "100ohm/1/10W/F/0603"
RC58 RC59 RC62 RC63 RC138 RC139: library part R0603SM, "300Kohm/1/10W/F/0603"
RC78: library part "011-202020-0 R0603SM", "2Kohm/1/10W/F/0603"
RC81 RC82 RC85: library part "011-302020-0 R0603SM", "3Kohm/1/10W/F/0603"
RC86: library part "011-000020-0 R0603SM", "0ohm/1/10W/F/0603"
RC90 RC92 RC95: library part "011-472020-0 R0603SM", "4.7Kohm/1/10W/F/0603"
RC103 RC126 RC142 RC152: library part R0603SM, "40.2Kohm/1/10W/F/0603"
RC104 RC118: library part "011-492020-0 R0603SM", "4.99Kohm/1/10W/F/0603"
RC115 RC349 RC363 RC374 RC386: library part R0603SM, "5.1Kohm/1/10W/F/0603"
RC125: library part R0603SM, "32.4Kohm/1/10W/F/0603"
RC129 RC346 RC454 RC472 RC481 RC490 RC491 RC493 RC494 RC495 RC499: library part R0603SM, "20Kohm/1/10W/F/0603"
RC130: library part R0603SM, "0ohm/1/10W/F/0603"
RC148 RC153 RC161 RC170 RC173 RC193 RC194 RC212 RC214 RC215 RC216 RC217 RC223 RC225 RC226 RC227 RC232 RC236 RC237 RC239 RC244 RC245 RC250 RC251 RC253 RC254 RC259 RC262 RC267 RC268 RC272 RC291 RC293 RC294 RC295 RC297 RC299 RC300 RC301 RC302 RC307 RC308 RC313 RC315 RC318 RC320 RC321 RC323 RC324 RC330 RC331 RC332 RC333 RC336 RC337 RC340 RC350 RC352 RC353 RC361 RC362 RC364 RC371 RC372 RC373 RC381 RC382 RC383 RC384 RC385 RC465 RC473 RC474 RC505 RC510 RC512 RC513 RC514 RC515 RC516 RC517 RC618 RC619 RC622 RC625 RC635 RC636 RC639 RC647 RC648 RC653 RC654 RC658 RC659 RC660 RC661 RC662 RC663 RC665 RC671 RC673 RC674 RC675 RC679 RC680 RC684 RC685 RC686 RC687 RC706: library part R0603SM, "4.7Kohm/1/10W/F/0603"
RC150 RC532 RC533 RC535: library part R0603SM_7, "4.7Kohm/1/10W/F/0603"
RC162 RC210 RC222 RC224 RC231 RC248 RC252 RC258 RC304 RC305 RC309 RC310 RC311 RC312 RC325 RC326 RC327 RC328 RC358 RC365: library part R0603*4SM, "4.7Kohm/J/0603*4"
RC182 RC593: library part R1206SM-499K, "499Kohm/1/4W/F/1206"
RC185 RC195: library part R3W-1K, "5Mohm/1W/F"
RC188 RC707 RC708 RC709 RC710: library part R0603SM, "33Kohm/1/10W/F/0603"
RC204 RC322 RC501 RC504: library part R1206SM, "2Kohm/1/4W/F/1206"
RC206 RC284 RC466 RC467 RC610: library part R0603SM, "49.9Kohm/1/10W/F/0603"
RC247: library part R0603SM, "22.1Kohm/1/10W/F/0603"
RC266 RC624: library part R0603SM, "4.7Mohm/1/10W/F/0603"
RC283 RC498 RC601 RC603 RC623 RC627 RC640 RC641 RC693: library part R0603SM, "2Kohm/1/10W/F/0603"
RC344: library part R0603SM, "7.5Kohm/1/10W/F/0603"
RC345: library part R0603SM, "2.49Kohm/1/10W/F/0603"
RC354 RC355 RC356 RC357 RC367 RC368 RC369 RC370 RC376 RC377 RC378 RC379 RC387 RC388 RC389 RC390: library part R1206SM, "51ohm/1/4W/F/1206"
RC451 RC452: library part R0603SM, "6.49Kohm/1/10W/F/0603"
RC463 RC464: library part R0603SM, "499Kohm/1/10W/F/0603"
RC477 RC480: library part R0603SM_7_1_1_1, "499ohm/1/10W/F/0603"
RC482 RC486: library part R0603SM_7_1_1_1, "6.8Kohm/1/10W/F/0603"
RC492: library part "NC R0603SM"
RC500: library part "011-104020-0 R0603SM", "100Kohm/1/10W/F/0603"
RC503: library part R0603SM, "24.9Kohm/1/10W/F/0603"
RC506 RC507: library part R0603SM, "200Kohm/1/10W/F/0603"
RC511: library part R0603SM, "130Kohm/1/10W/F/0603"
RC518 RC519: library part R0603SM_7_1_1_1, "1Kohm/1/10W/F/0603"
RC702: library part R0603SM, "220ohm/1/10W/F/0603"
SC1 SC2 SC3 SC4 SC5: library part SC40_M3, "NC"
SC6: library part SC50_M4-GND, "SC50M4"
SC7 SC8: library part SC-MC
SW2: library part 17KDTSM-6, "6*6*4.3mm/Brown/160gf"
SW3: library part SW-DIP4, "DPL-04R-V/DIP"
TA1: library part "ETD29 -1", "3.3mH/ETD39H/PC40/卧式/KB1892-20156"
UA10 UA11: library part "050-210030-0 SO8-5X4-PD", "Converter/SO-8"
UA12: library part 17KUC2845D8, "Current-Mode PWM/SOIC-8"
UA13: library part "IC LM2903IM-SM", "Voltage Dual Comparator/SOIC-8"
UA14 UA20: library part "050-011000-0 LTV816SB-V", "Optocoupler/SO-4"
UC1 UC2 UC3: library part SSOP-20, "Octal Buffer/Driver/SSOP-20"
UC4: library part C3245SM, "Transceiver/TSSOP-24"
UC12: library part "050-210000-0 SOT223", "Low Dropout Regulator/SOT-223-3"
UC14 UC16: library part "IC 14052BSM", "Analog Multiplexer/Demultiplexer/SOIC-16"
UC19 UC65: library part "IC 555SM", "NE555 Single Timer/SOP-8"
UC20: library part P176TSM, "Digital Signal Controller/LQFP-176"
UC23: library part 17KISL88021, "Triple Voltage Monitor/MSOP-8"
UC46: library part "050-210100-0 TSSOP28-9.8X4.5-PD", "Low Dropout Regulator/HTSSOP-28"
UC47: library part SOT-23SM, "Voltage Reference/SOT23-3"
UC48: library part SOT23-3, "Voltage Reference/SOT23-3"
UC50 UC51 UC52: library part 74LS00, "Quad 2-Input NAND Gate/SO-14"
UC63 UC64 UC67 UC68 UC70 UC71: library part "OPTO 2561L2-1SM", "Optocoupler/SO-4"
UC66: library part "IC 14066B", "Quad Muliplexer/SOIC-14"
UC72: library part MAX232SM_1, "Driver/Receiver/SOIC-16"
UC73: library part IC-TMS320F28035, "Microcontroller/80-Pin PN LQFP"
UC76: library part "IC M24128SM", "EEPROM/SO-8"
UC601 UC604 UC605 UC641 UC643: library part "17K IC SN74LVC07AD", "Hex Buffer/Driver/SOIC-14"
UC603 UC610: library part 17KSN74LVC06AD, "6-channel inverter buffers/drivers/SOIC-14"
UC606 UC607 UC608 UC609 UC622 UC636: library part "IC 239SM", "Quad Differential Comparator/SOIC-14"
UC611 UC612: library part "IC 14081SM", "2-Input AND Gate/SOIC-14"
UC614 UC626: library part "IC 2903TSM", "Voltage Dual Comparator/SOIC-8"
UC621 UC624 UC627 UC629 UC630 UC632 UC633 UC634 UC635 UC637 UC638: library part "IC TL074SM", "Operational Amplifier/SOIC-14"
UC625: library part "IC TL072SM", "Operational Amplifiers/SO-8"
XLC1: library part XL49TSM_1, "30MHZ/20pF/±30ppm/5.0*3.2"
YC1: library part "100-100010-0 XL5032SM", "20MHz/18pF/±10ppm/5.0*3.2"
ZDA1: library part "DZ MMSZ18VSM", "0.5W/15V/SOD-123"
ZDC1: library part "DZ MMSZ7V5SM"

## Free pads (board coordinates)
  round 1.1 smd far side: 0(39.25,128.25) 1(45.25,135.75) 1(118.25,138.5) 2(50.5,131.25) 2(97,200.25) 3(46,128) 3(99.5,47.25) 4(21.75,76.5) 4(50.25,128) 5(19,137.5) 5(123.2,86.1) 5(126.3,87.5) 6(84,211.25) 6(130,25.25) 7(35.45,171.5) 7(127.695,22.195) 8(57.5,242) 8(125.155,22.345) 9(122,27.5) 10(121.75,21.409) 11(123.885,19.75) 12(73.5,169) 13(95.75,180.25) 14(88,174.5) 15(12.75,144.5) 16(19.75,141.75) 17(32.5,145.5) 18(29.73,143.02) 19(48.35,217.45) 20(66.5,57.5) 21(28,48.25) 22(37.08,42.67) ICT(6.75,23) ICT(8.3,58.2) ICT(8.75,41.25) ICT(8.75,35.45) ICT(9,61.75) ICT(9.25,52.1) ICT(9.25,155) ICT(9.95,139.8) ICT(10,151.5) ICT(10.706,68.206) ICT(11.45,25.95) ICT(12,168.75) ICT(12,191.75) ICT(12.25,74.5) ICT(12.5,152.75) ICT(12.5,175) ICT(12.5,178) ICT(12.5,181.25) ICT(12.75,172) ICT(13,165.5) ICT(13.55,23) ICT(14,148.75) ICT(14.75,183.5) ICT(15,142.5) ICT(15.25,235.25) ICT(16,232.75) ICT(16.25,78.25) ICT(16.45,64.75) ICT(16.8,25.45) ICT(18,72.115) ICT(18,152.5) ICT(18.1,239) ICT(19.75,207.5) ICT(19.8,18.25) ICT(20.25,81) ICT(20.5,155.5) ICT(20.529,194.354) ICT(20.75,160.25) ICT(20.75,222.5) ICT(21,165.75) ICT(21,225.35) ICT(21.25,70.845) ICT(22.65,163.85) ICT(22.69,137.94) ICT(22.75,148.6) ICT(23.25,155) ICT(23.25,161.25) ICT(23.25,189.25) ICT(23.5,242.4) ICT(24.25,170.5) ICT(24.25,173) ICT(24.25,177.75) ICT(24.25,211) ICT(24.871,198.129) ICT(25.25,148) ICT(25.683,191.567) ICT(25.9,203.25) ICT(26.25,78.5) ICT(26.25,165.5) ICT(26.5,73.25) ICT(26.75,171.75) ICT(26.75,175.5) ICT(26.75,189) ICT(26.85,162.75) ICT(27,97.75) ICT(27,103.25) ICT(27,126.5) ICT(27.25,100.5) ICT(27.75,169) ICT(27.75,183.25) ICT(28.25,91.5) ICT(28.5,158) ICT(28.636,190.364) ICT(29,148.75) ICT(29.5,145.5) ICT(29.5,160.75) ICT(29.5,201.25) ICT(29.69,198.69) ICT(30.25,194.25) ICT(30.25,223.25) ICT(30.5,153.25) ICT(30.5,218.75) ICT(30.9,238.7) ICT(31.1,73.25) ICT(31.25,206.25) ICT(31.75,37.25) ICT(31.75,119.75) ICT(32.25,93.25) ICT(32.5,203.75) ICT(32.75,166.5) ICT(32.75,189.75) ICT(33,222.75) ICT(33,244.8) ICT(33.25,130.25) ICT(33.75,147.75) ICT(33.9,89.4) ICT(34.25,76.25) ICT(34.8,98.3) ICT(35,174.75) ICT(36.25,116) ICT(36.25,226.5) ICT(36.25,230.75) ICT(36.75,67.25) ICT(37,113.5) ICT(37,144.25) ICT(37.25,223) ICT(37.845,165.345) ICT(38,92.85) ICT(38,140.25) ICT(38.25,64.75) ICT(38.25,220) ICT(38.65,100.35) ICT(39,89) ICT(39.25,15.75) ICT(40.5,82.85) ICT(40.5,205.75) ICT(40.75,216.75) ICT(41.1,115.15) ICT(41.25,225) ICT(41.5,197.25) ICT(41.5,222) ICT(41.5,241.75) ICT(41.75,147.75) ICT(42,182.5) ICT(42,191) ICT(42.25,201) ICT(42.25,212.5) ICT(42.5,164.75) ICT(42.5,215) ICT(42.5,238.75) ICT(42.502,218.752) ICT(42.647,64.103) ICT(42.75,161.5) ICT(42.75,187) ICT(42.75,189) ICT(43.25,184) ICT(43.25,185.5) ICT(43.5,128.25) ICT(43.75,209.5) ICT(44,233) ICT(44.25,67.5) ICT(44.25,72.75) ICT(44.25,205.5) ICT(44.5,177.25) ICT(44.535,81.535) ICT(45.5,70.75) ICT(45.5,165) ICT(45.75,148.25) ICT(46,175.75) ICT(47.15,74.9) ICT(47.25,177.75) ICT(47.5,139.75) ICT(47.5,251.5) ICT(47.75,209.25) ICT(48,235.5) ICT(48.45,148.2) ICT(48.75,189) ICT(48.75,242.5) ICT(49,176.25) ICT(49.5,81.497) ICT(49.5,94.75) ICT(49.75,231.5) ICT(50,66.5) ICT(50.5,178.25) ICT(50.5,114.75) ICT(50.75,236.5) ICT(51,209.25) ICT(51.25,215.5) ICT(51.5,146.75) ICT(52.25,162) ICT(52.5,139.75) ICT(52.75,168.8) ICT(53,178.5) ICT(53,233) ICT(53.25,213) ICT(53.5,109.25) ICT(53.75,218.5) ICT(55,140.5) ICT(55.25,63) ICT(55.5,137.05) ICT(56,133.5) ICT(56,178) ICT(56.159,214.25) ICT(56.25,130.75) ICT(56.25,233) ICT(56.5,105.25) ICT(57.121,150.379) ICT(57.157,216.843) ICT(57.25,162) ICT(58,209.25) ICT(58.209,123.041) ICT(58.25,127.75) ICT(58.25,234.5) ICT(58.75,136.25) ICT(58.75,145.75) ICT(58.75,237.25) ICT(60,213) ICT(60.25,218) ICT(60.5,119.75) ICT(60.75,124.75) ICT(61,163.25) ICT(61.25,209.25) ICT(61.5,69.75) ICT(61.75,100.75) ICT(62,172) ICT(62.25,144.75) ICT(62.5,138.75) ICT(62.5,243.25) ICT(62.75,179) ICT(63,237.75) ICT(63.5,232) ICT(63.75,167.25) ICT(64.75,209.25) ICT(64.75,220.25) ICT(65.4,176.1) ICT(65.9,135.6) ICT(66.22,139.22) ICT(66.25,124.75) ICT(66.5,144) ICT(66.5,217.75) ICT(67.5,122) ICT(68,170) ICT(68,243.5) ICT(68.5,149.75) ICT(68.75,119.5) ICT(68.75,124.25) ICT(68.75,127) ICT(68.75,219.75) ICT(68.75,246.25) ICT(69.25,165.25) ICT(69.5,157.257) ICT(69.5,241.25) ICT(69.75,140.25) ICT(70.25,153) ICT(70.25,176) ICT(70.3,227.583) ICT(70.5,134) ICT(70.75,222.75) ICT(71.026,137.676) ICT(71.405,130.345) ICT(72.5,95) ICT(72.75,132.5) ICT(72.75,220.25) ICT(73.25,199.5) ICT(73.5,180.75) ICT(73.75,135) ICT(73.75,183.5) ICT(74,150.25) ICT(74.25,137.5) ICT(74.35,226.65) ICT(74.5,123) ICT(74.5,165.75) ICT(75,60.5) ICT(75,207) ICT(75.25,128) ICT(75.25,130.75) ICT(75.5,221.5) ICT(75.75,156.75) ICT(76.25,192.75) ICT(76.25,224.75) ICT(76.5,154.25) ICT(76.725,134.775) ICT(77,247.5) ICT(77.025,209.5) ICT(77.5,101.5) ICT(77.5,115.25) ICT(77.5,143.25) ICT(77.65,120.35) ICT(77.75,128) ICT(77.75,238.75) ICT(78,132.5) ICT(78.25,125.25) ICT(78.25,190.25) ICT(79,232.75) ICT(79.5,77.025) ICT(80,160.75) ICT(80,226.1) ICT(80.25,62.5) ICT(80.25,68) ICT(80.5,157.25) ICT(80.683,88.483) ICT(80.75,110.25) ICT(80.75,116) ICT(81.5,119) ICT(81.5,121.75) ICT(81.5,172.5) ICT(81.5,210.25) ICT(81.75,200.5) ICT(82.5,107) ICT(83.25,159) ICT(83.75,135.5) ICT(84,116.25) ICT(84,142) ICT(85,247.25) ICT(85.75,144) ICT(85.9,224.85) ICT(86.21,238.21) ICT(86.25,139) ICT(86.25,209.75) ICT(86.5,101.5) ICT(86.5,147.75) ICT(86.5,221) ICT(87,122.5) ICT(87,127.25) ICT(87.2,107.75) ICT(87.5,153.25) ICT(87.75,17.75) ICT(87.75,216.5) ICT(88.25,167.5) ICT(88.709,184.041) ICT(88.75,104.75) ICT(89,28) ICT(89,139.25) ICT(89,163.75) ICT(89.25,146.5) ICT(89.25,202) ICT(89.5,142.5) ICT(89.5,170) ICT(90,98.25) ICT(90,107.77) ICT(90,132) ICT(90,215.25) ICT(90.493,179.243) ICT(90.5,176) ICT(91,162.75) ICT(91.315,205.685) ICT(91.5,208.75) ICT(91.75,118.75) ICT(91.75,247.25) ICT(92,200.605) ICT(92.4,139) ICT(92.5,148.25) ICT(92.75,127.5) ICT(92.96,133.79) ICT(93.25,179.75) ICT(93.5,162.75) ICT(93.75,184) ICT(93.75,189) ICT(94,117.5) ICT(94.085,204.415) ICT(94.225,141.725) ICT(94.25,238.75) ICT(95.22,225.53) ICT(95.5,106.5) ICT(95.75,17.25) ICT(95.75,37) ICT(95.75,147) ICT(95.75,196.75) ICT(96,137.25) ICT(96,187) ICT(96,228) ICT(96.27,98) ICT(96.45,210.95) ICT(96.5,122.5) ICT(96.7,127.5) ICT(97.4,223.25) ICT(97.435,83.535) ICT(97.491,190.517) ICT(97.5,133.25) ICT(97.75,164.75) ICT(98,145.75) ICT(98.2,140.75) ICT(98.25,185.85) ICT(98.25,247) ICT(98.5,214) ICT(98.65,52.65) ICT(98.75,64.75) ICT(98.75,103.25) ICT(98.9,71.15) ICT(99,130.75) ICT(99,148.25) ICT(99.23,98) ICT(99.25,137) ICT(99.5,109.25) ICT(99.5,77.5) ICT(99.875,201.875) ICT(100,118.5) ICT(100.35,56.75) ICT(100.75,224.25) ICT(101,121.5) ICT(101.5,158) ICT(101.5,181) ICT(101.5,204) ICT(101.75,98) ICT(101.75,103.75) ICT(101.75,210.25) ICT(102,213) ICT(102.25,124) ICT(102.75,143.25) ICT(102.75,238.5) ICT(103,139.75) ICT(103.25,151.5) ICT(103.29,128.71) ICT(103.5,121.75) ICT(103.5,185.946) ICT(104.35,178.6) ICT(104.4,86.1) ICT(104.5,64.5) ICT(104.5,165) ICT(104.5,194.75) ICT(104.525,223.5) ICT(104.75,131.5) ICT(104.75,144.5) ICT(104.85,111.9) ICT(105.25,59.25) ICT(105.25,98.25) ICT(105.305,206.195) ICT(105.5,75) ICT(105.75,52.5) ICT(105.85,201.25) ICT(106.15,125.25) ICT(106.25,104) ICT(106.5,217.5) ICT(106.816,109) ICT(106.892,156.766) ICT(107,148) ICT(107.25,194) ICT(107.65,69.85) ICT(107.75,97.75) ICT(108.25,226) ICT(108.5,201.25) ICT(108.5,247.25) ICT(108.75,105.25) ICT(108.75,136) ICT(108.75,150.5) ICT(108.75,205.25) ICT(108.85,81.65) ICT(109,121.5) ICT(109.25,127) ICT(109.25,140.25) ICT(109.341,167.75) ICT(109.5,222.75) ICT(110,191) ICT(110.25,214.5) ICT(110.25,219) ICT(110.345,210.595) ICT(110.5,171.25) ICT(110.5,203) ICT(110.75,176.5) ICT(110.75,238.75) ICT(111.15,69.85) ICT(111.15,158.9) ICT(111.25,151.75) ICT(111.25,182.75) ICT(111.5,103.75) ICT(111.75,137) ICT(112.125,107.125) ICT(112.25,81.75) ICT(112.25,165.5) ICT(112.25,196.25) ICT(112.3,144.95) ICT(112.55,131.7) ICT(112.75,224.75) ICT(113.25,201.75) ICT(113.5,110.31) ICT(114.5,198.75) ICT(114.75,152.25) ICT(114.75,244.5) ICT(115,121.25) ICT(115,127.5) ICT(115.15,140.4) ICT(115.25,44) ICT(115.25,133.79) ICT(115.5,222) ICT(116.25,76.25) ICT(116.25,123.5) ICT(116.322,227.822) ICT(116.5,32.75) ICT(116.65,112.1) ICT(116.75,85.25) ICT(117.25,224.75) ICT(117.5,190.5) ICT(117.685,198.815) ICT(117.73,66.5) ICT(117.75,82.25) ICT(117.75,161) ICT(118,103.25) ICT(118.25,126.25) ICT(118.25,146.75) ICT(118.25,195.5) ICT(118.27,98) ICT(118.5,150) ICT(118.65,203.35) ICT(118.75,141) ICT(119.25,129) ICT(119.5,238.5) ICT(120,232.5) ICT(120.75,100) ICT(120.75,217.75) ICT(120.75,223.9) ICT(121,150.5) ICT(121,199.5) ICT(121.25,157.25) ICT(121.25,202.75) ICT(121.345,17.095) ICT(121.5,210.25) ICT(121.75,214) ICT(122.75,193.25) ICT(123.309,204.191) ICT(123.5,197.75) ICT(124,215.25) ICT(124.2,157.5) ICT(125,222.5) ICT(125,232) ICT(125.25,226.02) ICT(126,220) ICT(126.75,197) ICT(126.823,199.927) ICT(127.75,227.29) ICT(128.8,54) ICT(129.5,217.31) ICT(130.21,204.04) ICT(130.25,34.25) ICT(130.5,210.25) ICT(130.75,49.5) ICT(130.75,223.5) ICT(131.25,87.75) ICT(133,199.75) ICT(133,205.5) ICT(134.4,84.4)
  round 1.1 on Bottom Solder: ICT(99.25,47)

## Via types
v1: diameter 0.8, hole 0.4, Top Layer to Bottom Layer, tented both sides, 1354 vias
v2: diameter 1.2, hole 0.7, Top Layer to Bottom Layer, 261 vias
v3: diameter 0.8, hole 0.4, Top Layer to Bottom Layer, 58 vias
v4: diameter 1.2, hole 0.7, Top Layer to Bottom Layer, tented top, 58 vias
v5: diameter 0.8, hole 0.4, Top Layer to Bottom Layer, tented top, 22 vias
v6: diameter 1.2, hole 0.7, Top Layer to Bottom Layer, tented both sides, 13 vias
v7: diameter 1.2, hole 0.7, Top Layer to Bottom Layer, tented bottom, 8 vias